# EAGLE board ArduinoTouchSynth (EAGLE 8.2.2)
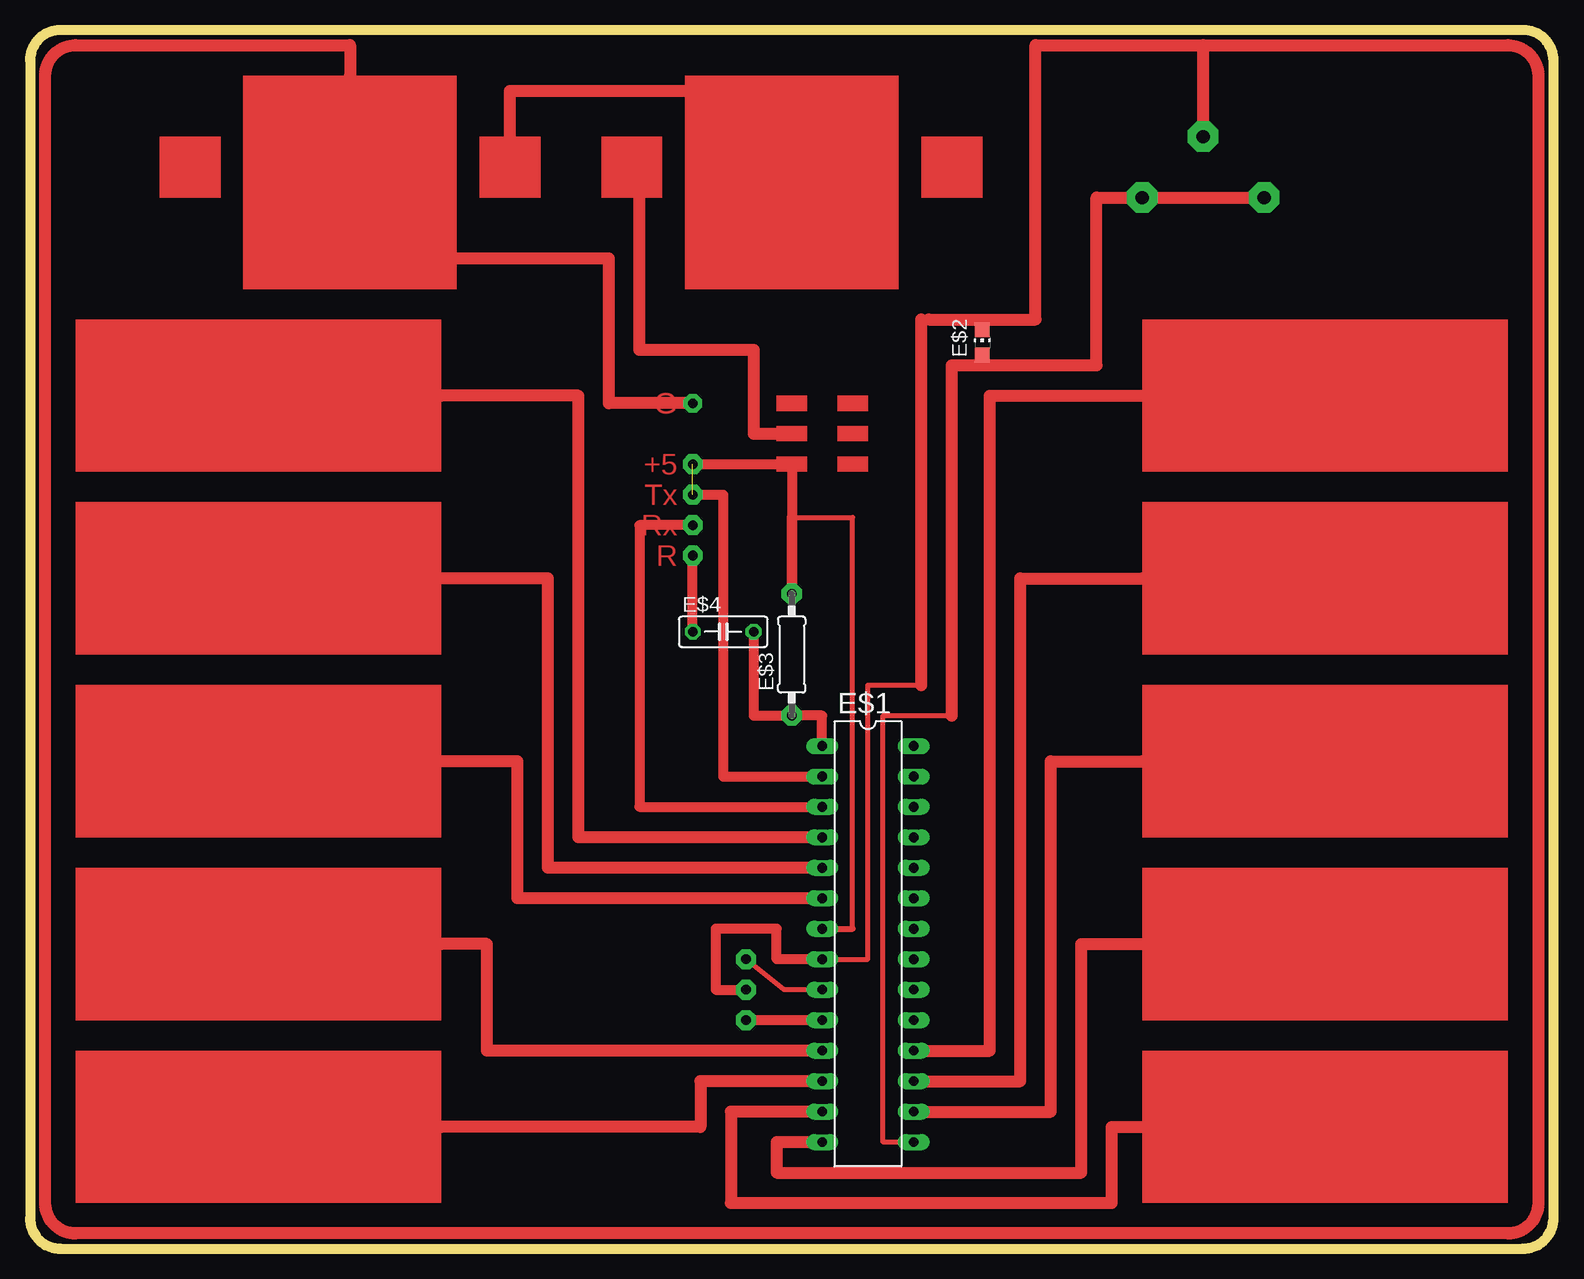
[diagram p0: board, top side]

Size 127 x 101.6 mm. Coordinates in mm from the lower left corner, seen from the top.
Outline: 0,99.06 0,2.54 arc90 2.54,0 124.46,0 arc90 127,2.54 127,99.06 arc90 124.46,101.6 2.54,101.6 arc90 0,99.06
Copper layers (1*16): Top 0.035mm / dielectric 1.5mm / Bottom 0.035mm
Design rules "default": minimum track width 10mil, minimum drill 24mil, track to track 8mil, track to pad 8mil, pad to pad 8mil, via to via 8mil, smd to smd 8mil, copper to edge 40mil, drill to drill 8mil, minimum pad ring 10mil, minimum via ring 8mil, stop-mask expansion 4mil, vias tented up to drill 0mil, thermal gap 10mil
Net classes: 0 default: width 0.4 mm, clearance 0.3 mm; 1 power: width 0.6 mm, clearance 0.3 mm

## Footprints (pad centres in the part's own frame; a part is rotated, then mirrored left to right if it is on the bottom)
DIL28-3 = drill 0.813 long: 1 -16.51,-3.81; 2 -13.97,-3.81; 3 -11.43,-3.81; 4 -8.89,-3.81; 5 -6.35,-3.81; 6 -3.81,-3.81; 7 -1.27,-3.81; 8 1.27,-3.81; 9 3.81,-3.81; 10 6.35,-3.81; 11 8.89,-3.81; 12 11.43,-3.81; 13 13.97,-3.81; 14 16.51,-3.81; 15 16.51,3.81; 16 13.97,3.81; 17 11.43,3.81; 18 8.89,3.81; 19 6.35,3.81; 20 3.81,3.81; 21 1.27,3.81; 22 -1.27,3.81; 23 -3.81,3.81; 24 -6.35,3.81; 25 -8.89,3.81; 26 -11.43,3.81; 27 -13.97,3.81; 28 -16.51,3.81
CHIP-LED0805 = smd 1.2 x 1.2: A 0,-1.05; C 0,1.05
0207/10 = drill 0.813 pad 1.676 octagon: 1 -5.08,0; 2 5.08,0
C050-025X075 = drill 0.813 octagon: 1 -2.54,0; 2 2.54,0

## Placement (x,y rotation side)
E$1  [DIL28-3]  69.85,25.4 270 top
E$2  [CHIP-LED0805]  79.38,75.56 0 top
E$3  [0207/10]  63.5,49.53 90 top
E$4  [C050-025X075]  57.78,51.44 0 top

## Library data of the parts
E$1 = atmel
E$2 = ref-packages-longpad
E$3 E$4 = adafruit

## Nets
S$1: E$1.4
S$2: E$1.5
S$3: E$1.6
S$4: E$1.11
S$5: E$1.12
S$6: E$1.13
S$7: E$1.14
S$8: E$1.17
S$9: E$1.16
S$10: E$1.18
S$12: E$1.8
S$13: E$1.7
S$14: E$1.10
S$15: E$1.1
S$16: E$1.15
S$17: E$1.9
S$18: E$1.2
S$20: E$1.3

## Tracks (layer width: path | path; a pad name or v marks a point on that pad's centre or on a via)
S$1
  Top 1.016: E$1.4 45.72,34.29 45.72,71.12 34.29,71.12
S$2
  Top 1.016: E$1.5 43.18,31.75 43.18,55.88 34.29,55.88
S$3
  Top 1.016: E$1.6 40.64,29.21 40.64,40.64 34.29,40.64
S$4
  Top 1.016: E$1.11 38.1,16.51 38.1,25.4 34.29,25.4
S$5
  Top 1.016: E$1.12 55.88,13.97 55.88,10.16 34.29,10.16
S$6
  Top 1.016: E$1.13 58.42,11.43 58.42,3.81 90.17,3.81 90.17,10.16 92.71,10.16
S$7
  Top 1.016: E$1.14 62.23,8.89 62.23,6.35 87.63,6.35 87.63,25.4 92.71,25.4
S$8
  Top 1.016: E$1.17 82.55,13.97 82.55,55.88 92.71,55.88
S$9
  Top 1.016: E$1.16 85.09,11.43 85.09,40.64 92.71,40.64
S$10
  Top 1.016: E$1.18 80.01,16.51 80.01,71.12 92.71,71.12
S$11
  Top 1.016: 62.87,67.94 60.33,67.94 60.33,74.93 50.8,74.93 50.8,87.63
S$12  (via drill 0.8 pad 1.65, 1.1 pad 2.54)
  Top 0.406: E$1.8 69.85,24.13 69.85,46.99 74.3,46.99
  Top 0.508: 74.3,77.47 74.93,77.47
  Top 0.813: E$1.8 62.23,24.13 62.23,26.67 57.15,26.67 57.15,21.59 v59.69,21.59
  Top 1.016: 74.3,46.99 74.3,77.47 | 74.93,77.47 83.82,77.47 83.82,100.33 97.79,100.33 | 97.79,100.33 v97.79,92.71 | 97.79,100.33 123.19,100.33 arc-90 125.73,97.79 125.73,3.81 arc-90 123.19,1.27 3.81,1.27 arc-90 1.27,3.81 1.27,97.79 arc-90 3.81,100.33 26.67,100.33 26.67,97.79
S$13
  Top 0.406: 68.58,26.67 68.58,60.96 63.5,60.96
  Top 0.508: E$1.7 68.58,26.67
  Top 0.813: 63.5,54.61 63.5,60.96
S$14  (via drill 0.8 pad 1.65)
  Top 0.813: E$1.10 v59.69,19.05
S$15
  Top 0.813: E$1.1 66.04,44.45 63.5,44.45
S$16  (via drill 1.1 pad 2.54)
  Top 0.406: 76.83,44.45 71.12,44.45 71.12,8.89 E$1.15
  Top 1.016: 76.83,44.45 76.83,73.66 88.9,73.66 88.9,87.63 v92.71,87.63 v102.87,87.63
S$17  (via drill 0.8 pad 1.65)
  Top 0.406: E$1.9 62.87,21.59 v59.69,24.13
S$18  (via drill 0.8 pad 1.65)  (1 unrouted)
  Top 0.813: 63.5,53.98 63.5,65.41 v55.24,65.41 | E$1.2 57.78,39.37 57.78,62.87 v55.24,62.87
S$19  (via drill 0.8 pad 1.65)
  Top 0.813: 55.24,51.44 v55.24,57.78
S$20  (via drill 0.8 pad 1.65)
  Top 0.813: v55.24,60.33 50.8,60.33 50.8,36.83 E$1.3
S$21  (via drill 0.8 pad 1.52)
  Top 1.016: v55.24,70.48 48.26,70.48 48.26,82.55 35.56,82.55
S$22
  Top 0.813: 60.33,51.44 60.33,44.45 63.5,44.45
S$26
  Top 1.016: 40.01,92.71 40.01,96.52 54.61,96.52
(copper drawn outside any net)
  shapes: Top area x23

## Text on the board
Top: G | +5 | Tx | Rx | R